# Altium PCB STLINKV2.PcbDoc (part 2 of 2)
Units mm, origin at the board's own origin, x right, y up, seen from the top; angles counter-clockwise.
Board outline 43.47 x 15.24 mm, 2 copper layers (Top Layer, Bottom Layer), stack 1.062 mm thick; 48 components, 36 nets, 171 pads, 85 vias.
Unrouted connection lines stored in the file: 38.
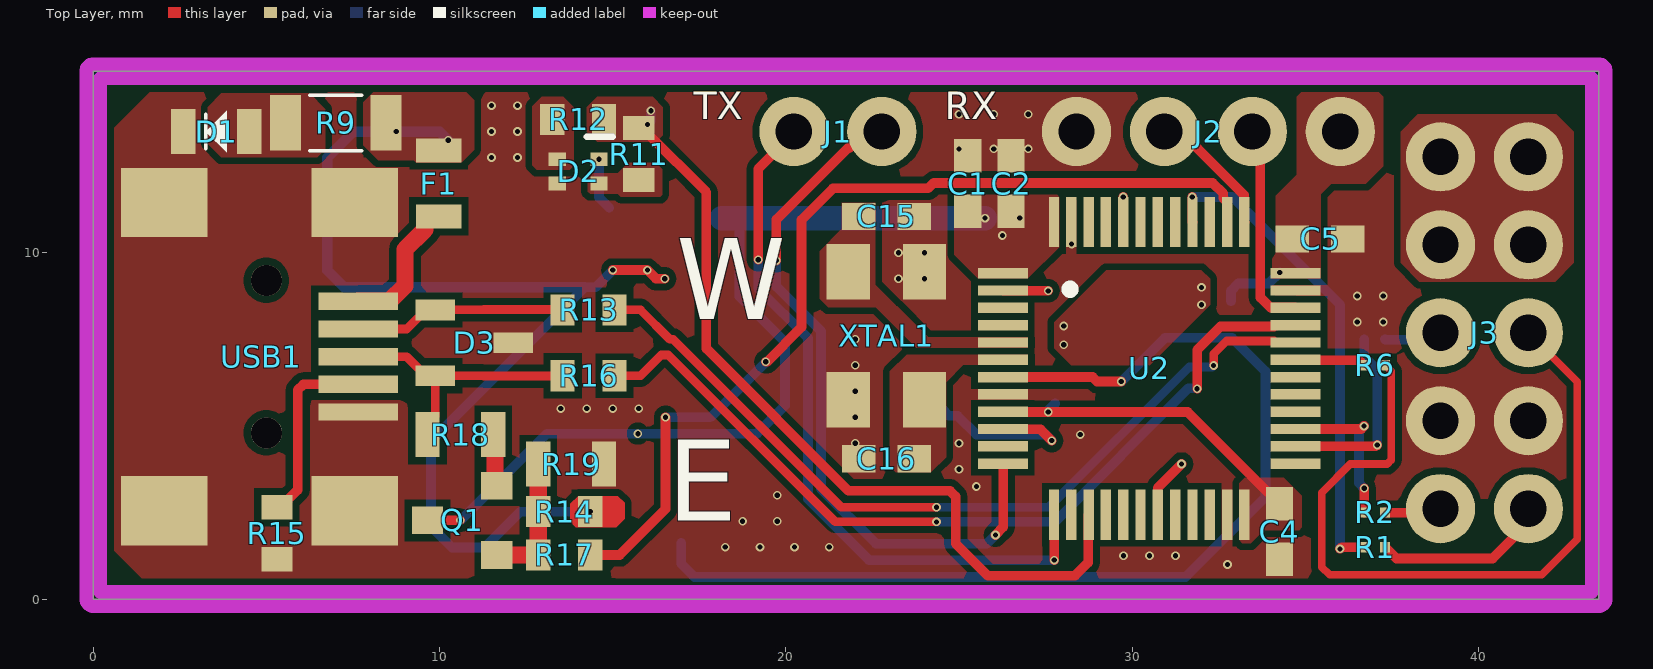
[diagram p0: Top Layer view]

## Part data (continued)
R19: library part "RES 36K OHM 0805", "SMD Chip Resistor, 36 kOhm, ± 1%, 125 mW, 0805 [2012 Metric], Thick Film, General Purpose", Case Code (Metric)=2012, Case Code (Imperial)=0805, Manufacturer=Yageo, Max Operating Temperature=155°C, Max Power Dissipation=125mW, Min Operating Temperature=-55°C, Resistance=36kR, Supplier Part Number 1=1143922, Temperature Coefficient=100ppm/°C, Tolerance=1%, Voltage Rating=150V, Case/Package=0805, Category="Chip SMD Resistors", ComponentLink1Description=http://www.mouser.com/ds/2/447/Yageo_08112016_RC0805-968729.pdf?src-supplier=Mouser, ComponentLink1URL=http://www.mouser.com/ds/2/447/Yageo_08112016_RC0805-968729.pdf?src-supplier=Mouser, ComponentLink2Description=https://datasheet.octopart.com/RC0805FR-0736KL-Yageo-datasheet-164759695.pdf?src-supplier=Future+Electronics, ComponentLink2URL=https://datasheet.octopart.com/RC0805FR-0736KL-Yageo-datasheet-164759695.pdf?src-supplier=Future+Electronics, ComponentLink3Description=http://www.yageo.com/documents/recent/PYu-RC_Group_51_RoHS_L_9.pdf?src-supplier=Digikey, ComponentLink3URL=http://www.yageo.com/documents/recent/PYu-RC_Group_51_RoHS_L_9.pdf?src-supplier=Digikey, ComponentLink4Description=https://datasheet.octopart.com/RC0805FR-0736KL-Yageo-datasheet-118657.pdf?src-supplier=Digikey, ComponentLink4URL=https://datasheet.octopart.com/RC0805FR-0736KL-Yageo-datasheet-118657.pdf?src-supplier=Digikey, DesignedBy="Aslı Kurt", Features="Moisture Resistant", Lead Free=5697LeadFree, Manufacturer Part Number=RC0805FR-0736KL, Number of Terminations=2, Packaging="Tape and Reel", Power Rating=125mW, Pricing 1="5000=0,0031, 25000=0,0029, 100000=0,0028, 250000=0,0027, 625000=0,0026 (USD)", Pricing 2="5000=0,0044, 10000=0,0038, 50000=0,0035, 250000=0,0032, 500000=0,0031 (USD)", Pricing 3="10=0,013, 100=0,008, 500=0,007, 1000=0,006, 2500=0,0055, 5000=0,005, 25000=0,004, 50000=0,0039 (EUR)", Pricing 4="1=0,1, 10=0,012, 50=0,012, 100=0,007, 1000=0,006, 10000=0,005 (USD)", Pricing 5="1=0,1, 10=0,016, 50=0,0132, 500=0,0102, 1000=0,00714 (USD)", RoHS=Yes, RoHS Compliant=Yes, Series=RC, Stock 1=215000, Stock 2=20000, Stock 3=8818, Stock 4=76809, Stock 5=212494, Supplier 1="Future Electronics", Supplier 2="Arrow Electronics", Supplier 3=Farnell, Supplier 4=Mouser, Supplier 5=Digikey, Supplier Part Number 2=RC0805FR-0736KL, Supplier Part Number 3=3496035, Supplier Part Number 4=603-RC0805FR-0736KL, Supplier Part Number 5=311-36.0KCRCT-ND, Termination=SMD/SMT, Voltage Rating (DC)=150V
SW1: "Switch Tactile N.O. SPST Button J-Bend 0.05A 16VDC 100000Cycles 3.92N SMD T/R", Contact Resistance=500mR, Manufacturer="ITT C&K", Manufacturer Part Number=PTS810SJG250SMTRLFS, Category="Tactile Switches", ComponentLink1Description=https://datasheet.ciiva.com/18514/pts810-4mar13-18514165.pdf?src-supplier=Digikey, ComponentLink1URL=https://datasheet.ciiva.com/18514/pts810-4mar13-18514165.pdf?src-supplier=Digikey, ComponentLink2Description=https://datasheet.ciiva.com/18514/pts810-4mar13-18514166.pdf?src-supplier=Digikey, ComponentLink2URL=https://datasheet.ciiva.com/18514/pts810-4mar13-18514166.pdf?src-supplier=Digikey, ComponentLink3Description=https://datasheet.ciiva.com/18514/pts810-4mar13-18514167.pdf?src-supplier=Digikey, ComponentLink3URL=https://datasheet.ciiva.com/18514/pts810-4mar13-18514167.pdf?src-supplier=Digikey, DesignedBy="Aslı Kurt", Lead Free=5697LeadFree, Number of Positions=2NUMBER, Pricing 1="2900=0,3356, 5800=0,3138, 8700=0,3015, 14500=0,2865, 20300=0,2771, 29000=0,2673 (USD)", Pricing 2="1=0,54, 10=0,505, 50=0,505, 100=0,406, 1000=0,333, 10000=0,265 (USD)", Pricing 3="1=0,65, 10=0,526, 25=0,4844, 100=0,4267, 250=0,39208, 500=0,36752, 1000=0,34425 (USD)", Pricing 4="2900=0,3109, 5800=0,29064, 8700=0,27928, 14500=0,26548, 20300=0,25668, 29000=0,2476 (USD)", RoHS=Yes, Stock 1=14500, Stock 2=5429, Stock 3=69769, Stock 4=63800, Supplier 1="Arrow Electronics", Supplier 2=Mouser, Supplier 3=Digikey, Supplier 4=Digikey, Supplier Part Number 1=PTS810SJG250SMTRLFS, Supplier Part Number 2=611-PTS810SJG250SMTR, Supplier Part Number 3=CKN10504DKR-ND, Supplier Part Number 4=CKN10504TR-ND
U1: "800-mA 15-V linear voltage regulator ; 4-SOT-223 0 to 125", Manufacturer="Texas Instruments", Manufacturer Part Number=LM1117MPX-3.3/NOPB, Supplier Part Number 1=926-LM1117MPX3.3NOPB, Category="Voltage Regulators - Linear", ComponentLink1Description=http://www.jameco.com/Jameco/Products/ProdDS/1282978.pdf?src-supplier=Jameco, ComponentLink1URL=http://www.jameco.com/Jameco/Products/ProdDS/1282978.pdf?src-supplier=Jameco, ComponentLink2Description=http://www.mouser.com/ds/2/405/snos412m-286860.pdf?src-supplier=Mouser, ComponentLink2URL=http://www.mouser.com/ds/2/405/snos412m-286860.pdf?src-supplier=Mouser, ComponentLink3Description=http://components.arrow.com/part/dataview/41724903S9714588N1317?src-supplier=Arrow+Electronics, ComponentLink3URL=http://components.arrow.com/part/dataview/41724903S9714588N1317?src-supplier=Arrow+Electronics, ComponentLink4Description=http://www.ti.com/general/docs/lit/getliterature.tsp?genericPartNumber=LM1117&fileType=pdf&src-supplier=Farnell, ComponentLink4URL=http://www.ti.com/general/docs/lit/getliterature.tsp?genericPartNumber=LM1117&fileType=pdf&src-supplier=Farnell, ComponentLink5Description=http://www.ti.com/general/docs/lit/getliterature.tsp?genericPartNumber=LM1117&&fileType=pdf&src-supplier=Farnell, ComponentLink5URL=http://www.ti.com/general/docs/lit/getliterature.tsp?genericPartNumber=LM1117&&fileType=pdf&src-supplier=Farnell, ComponentLink6Description=http://www.ti.com/lit/ds/symlink/lm1117.pdf?src-supplier=Digikey, ComponentLink6URL=http://www.ti.com/lit/ds/symlink/lm1117.pdf?src-supplier=Digikey, ComponentLink7Description=http://www.ti.com/general/docs/lit/getliterature.tsp?genericPartNumber=LM1117&fileType=pdf&src-supplier=Newark, ComponentLink7URL=http://www.ti.com/general/docs/lit/getliterature.tsp?genericPartNumber=LM1117&fileType=pdf&src-supplier=Newark, ComponentLink8Description=http://www.ti.com/general/docs/lit/getliterature.tsp?genericPartNumber=LM1117&&fileType=pdf&src-supplier=Avnet, ComponentLink8URL=http://www.ti.com/general/docs/lit/getliterature.tsp?genericPartNumber=LM1117&&fileType=pdf&src-supplier=Avnet, DesignedBy="Aslı Kurt", Pricing 1="1=1,09, 10=0,715, 50=0,715, 100=0,573, 1000=0,511, 10000=0,445 (USD)", Pricing 2="2000=0,4373, 4000=0,4373, 10000=0,4373, 24000=0,4373 (USD)", Pricing 3="1=1,15, 10=0,802, 25=0,7148, 100=0,6185, 250=0,5726, 500=0,54494, 1000=0,52214 (USD)", Pricing 4="100=0,651, 500=0,58, 1000=0,477 (EUR)", Pricing 5="50=0,662, 100=0,596, 250=0,536, 500=0,51 (GBP)", Radiation Hardening=5898YesNo, RoHS=Yes, Stock 1=43664, Stock 2=94000, Stock 3=15236, Stock 4=4117, Stock 5=3090, Supplier 1=Mouser, Supplier 2="Arrow Electronics", Supplier 3=Digikey, Supplier 4=Farnell, Supplier 5=Rs, Supplier Part Number 2=LM1117MPX-3.3/NOPB, Supplier Part Number 3=LM1117MPX-3.3/NOPBDKR-ND, Supplier Part Number 4=3122024RL, Supplier Part Number 5=2088523P, Thickness=1.6mm
U2: "ARM Cortex-M3 STM32 F1 Microcontroller 32-Bit 72MHz 64kB FLASH LQFP48 STM32F103C8T6", Case/Package=LQFP, Manufacturer=STMicroelectronics, Max Frequency=72MHz, Max Operating Temperature=85°C, Max Supply Voltage=3.6V, Min Operating Temperature=-40°C, Min Supply Voltage=2V, Nominal Supply Current=1.7uA, Package Quantity=1500, Supplier Part Number 1=7957939, Category=Microcontrollers, ComponentLink1Description=https://datasheet.ciiva.com/15122/getdatasheetpartid-69880-15122076.pdf?src-supplier=Verical, ComponentLink1URL=https://datasheet.ciiva.com/15122/getdatasheetpartid-69880-15122076.pdf?src-supplier=Verical, ComponentLink2Description=https://datasheet.ciiva.com/8054/1730126-8054942.pdf?src-supplier=Element14, ComponentLink2URL=https://datasheet.ciiva.com/8054/1730126-8054942.pdf?src-supplier=Element14, ComponentLink3Description=https://datasheet.ciiva.com/14100/pustm-arm-microcont-stm32f103-en-14100508.pdf?src-supplier=Distrelec, ComponentLink3URL=https://datasheet.ciiva.com/14100/pustm-arm-microcont-stm32f103-en-14100508.pdf?src-supplier=Distrelec, ComponentLink4Description=https://datasheet.ciiva.com/16210/cd00161566-16210248.pdf?src-supplier=Future+Electronics, ComponentLink4URL=https://datasheet.ciiva.com/16210/cd00161566-16210248.pdf?src-supplier=Future+Electronics, ComponentLink5Description=https://datasheet.ciiva.com/48687/001075658-da-01-en-mcu-64kb-mem-stm32f103c8t6-lqfp-48-stm-48687589.pdf?src-supplier=Conrad, ComponentLink5URL=https://datasheet.ciiva.com/48687/001075658-da-01-en-mcu-64kb-mem-stm32f103c8t6-lqfp-48-stm-48687589.pdf?src-supplier=Conrad, Core Architecture=ARM, Data Bus Width=32b, DesignedBy="Aslı Kurt", Height=1.4mm, Lead Free="Lead Free", Length=7mm, Manufacturer Part Number=STM32F103C8T6, Memory Size=64KB, Memory Type=FLASH, Number of A/D Converters=2NUMBER, Number of ADC Channels=10, Number of Channels=10NUMBER, Number of Pins=48, Number of Timers/Counters=3, Number of I/Os=37, Packaging=Tray, Pricing 1="250=3,45, 500=3,39, 750=3,36, 1000=3,34, 1250=3,27 (USD)", Pricing 2="250=2,63 (USD)", Pricing 3="1=5,61, 10=5,11, 50=4,3, 100=4,29, 1000=3,47, 10000=3,33 (USD)", Pricing 4="1=5,61, 10=4,64, 25=3,94, 50=3,93, 100=3,92, 250=3,76, 500=3,47 (EUR)", Pricing 5="1=3,7887, 10=3,5549, 25=3,1592, 50=3,139, 100=3,1122, 250=2,9509, 500=2,6084 (USD)", Pricing 6="1=6,11, 10=5,522, 25=5,2652, 80=4,57163, 250=4,36616, 500=3,9809, 1000=3,46724, 2500=3,33883 (USD)", RAM Size=20KB, RoHS=Yes, RoHS Compliant=Yes, Series=STM32F103C8, Stock 1=12000, Stock 2=8204, Stock 3=11174, Stock 4=68762, Stock 5=1132418, Stock 6=9084, Supplier 1="Future Electronics", Supplier 2="Future Electronics", Supplier 3=Mouser, Supplier 4=Farnell, Supplier 5="Arrow Electronics", Supplier 6=Digikey, Supplier Part Number 2=6124222, Supplier Part Number 3=511-STM32F103C8T6, Supplier Part Number 4=1447637, Supplier Part Number 5=STM32F103C8T6, Supplier Part Number 6=497-6063-ND, Weight=0.006349oz, Width=7mm, Interface=I2C,SPI,USB,CAN,USART
USB1: "Conn Mini USB 2.0 Type B RCP 5 POS 0.8mm Solder RA SMD 5 Terminal 1 Port", Color=Black, Flammability Rating="UL94 V-0", Manufacturer=EDAC, Max Operating Temperature=80°C, Min Operating Temperature=-30°C, Supplier Part Number 1=587-690-005-299-043, Category="USB Connectors", ComponentLink1Description=https://datasheet.ciiva.com/30246/690-005-299-043-30246515.pdf?src-supplier=Onlinecomponents.com, ComponentLink1URL=https://datasheet.ciiva.com/30246/690-005-299-043-30246515.pdf?src-supplier=Onlinecomponents.com, ComponentLink2Description=https://datasheet.ciiva.com/29660/690-005-299-043-29660027.pdf?src-supplier=Digikey, ComponentLink2URL=https://datasheet.ciiva.com/29660/690-005-299-043-29660027.pdf?src-supplier=Digikey, ComponentLink3Description=https://datasheet.ciiva.com/29660/690-005-299-043-29660028.pdf?src-supplier=Digikey, ComponentLink3URL=https://datasheet.ciiva.com/29660/690-005-299-043-29660028.pdf?src-supplier=Digikey, ComponentLink4Description=https://datasheet.ciiva.com/29660/690-005-299-043-29660029.pdf?src-supplier=Digikey, ComponentLink4URL=https://datasheet.ciiva.com/29660/690-005-299-043-29660029.pdf?src-supplier=Digikey, Connector Type=USB, Contact Material=Bronze, Contact Plating=Gold, DesignedBy="Aslı Kurt", Gender=Receptacle, Housing Material=Thermoplastic, Lead Free="Lead Free", Manufacturer Part Number=690-005-299-043, Mating Cycles=1500, Mount="Surface Mount,Horizontal", Number of Contacts=5, Number of Ports=1, Orientation="Right Angle", Packaging="Cut Tape", Pitch=0.8mm, Pricing 1="1=0,71, 10=0,476, 50=0,476, 100=0,397, 1000=0,337, 10000=0,27 (USD)", Pricing 2="1=0,75, 10=0,573, 25=0,5148, 50=0,4754, 100=0,4392, 250=0,39636, 500=0,36736 (USD)", Pricing 3="1=0,75, 10=0,573, 25=0,5148, 50=0,4754, 100=0,4392, 250=0,39636, 500=0,36736 (USD)", Pricing 4="1000=0,34102, 2000=0,31713, 3000=0,3042, 5000=0,28894, 7000=0,27949, 10000=0,26996, 25000=0,25 (USD)", RoHS=No, Series=690, Shielding=Unshielded, Stock 1=13065, Stock 2=62687, Stock 3=62687, Stock 4=62000, Supplier 1=Mouser, Supplier 2=Digikey, Supplier 3=Digikey, Supplier 4=Digikey, Supplier Part Number 2=151-1206-1-ND, Supplier Part Number 3=151-1206-6-ND, Supplier Part Number 4=151-1206-2-ND, Termination=Solder, Insulation Color=Black
XTAL1: "Crystal 8MHz ±10ppm (Tol) ±15ppm (Stability) 10pF FUND 100Ohm 4-Pin Mini-SMD T/R", Manufacturer="ECS International", Supplier Part Number 1=ECS-80-10-30B-CWN-, Category=LDO, ComponentLink1Description=https://ecsxtal.com/store/pdf/ecx_53b.pdf?src-supplier=Digikey, ComponentLink1URL=https://ecsxtal.com/store/pdf/ecx_53b.pdf?src-supplier=Digikey, ComponentLink2Description=http://www.ecsxtal.com/store/pdf/ecx_53b.pdf?src-supplier=Digikey, ComponentLink2URL=http://www.ecsxtal.com/store/pdf/ecx_53b.pdf?src-supplier=Digikey, ComponentLink3Description=https://datasheet.octopart.com/ECS-80-10-30B-CWN-TR-ECS-International-datasheet-145012644.pdf?src-supplier=Master+Electronics, ComponentLink3URL=https://datasheet.octopart.com/ECS-80-10-30B-CWN-TR-ECS-International-datasheet-145012644.pdf?src-supplier=Master+Electronics, DesignedBy="Aslı Kurt", Manufacturer Part Number=ECS-80-10-30B-CWN-TR, Pricing 1="1000=0,28356 (USD)", Pricing 2="1000=0,3761, 2000=0,3659 (USD)", Pricing 3="100=0,445, 250=0,434, 500=0,423, 1000=0,405, 5000=0,387, 10000=0,369 (EUR)", Pricing 4="1=0,64, 10=0,52, 50=0,52, 100=0,497, 1000=0,396, 10000=0,366 (USD)", Pricing 5="1=0,68, 10=0,587, 50=0,5288, 100=0,5057, 500=0,45618 (USD)", RoHS=Yes, Stock 1=2000, Stock 2=7000, Stock 3=1351, Stock 4=6496, Stock 5=15344, Supplier 1=Avnet, Supplier 2="Arrow Electronics", Supplier 3=Farnell, Supplier 4=Mouser, Supplier 5=Digikey, Supplier Part Number 2=ECS-80-10-30B-CWN-TR, Supplier Part Number 3=4059249RL, Supplier Part Number 4=520-80-10-30B-CWNT, Supplier Part Number 5=XC2708CT-ND

## Via types
v1: diameter 0.25, hole 0.15, Top Layer to Bottom Layer, tented both sides, 85 vias

## Nets (pads, with @x,y where several pads share a name; then routed paths per layer and width w, separated by ;. In a path a pad name is that pad's centre, name@x,y a point inside that pad or via, vN(x,y) a via of type N, cw(c..) or ccw(c..) an arc to the next point about the centre after c; other vN are vias at no path point)
3V3: C1.2 C2.2 C3.2 C4.2 C5.2 C6.2 C7.2 C8.2 C11.2 C12.1 D2.1 J2.1 J3.7 J3.8 J3.9 J3.10 Q1.1 R3.2 U1.2 U2.1 U2.9 U2.24 U2.36 U2.48 | length 38.4
  Top Layer w0.28: Q1.1 v1(10.6,2.275) ; U2.9@26.275,5.4 v1(27.575,5.4) 31.6,5.4 33.907,3.093 33.996,3.093 34.25,2.839 C4.2
  Bottom Layer w0.28: v1(10.6,2.275) 13.1,4.775 v1(15.725,4.775) 19.162,4.775 19.975,5.588 19.975,7.425 18.66,8.74 18.66,10.84 C12.1@18.5,11 ; v1(14.6,12.7) 14.6,11.6 U1.2@14.9,11.3 ; C12.1 C12.1@18.15,11 ; v1(27.575,5.4) 27.575,5.45 C8.2 ; C6.2 32.85,8.9 33.06,9.11 33.942,9.11 v1(34.261,9.428)
  Bottom Layer w0.7: C12.1@18.15,11 18.5,11 v1(25.75,11)
  other v1: 28.025,7.343 28.025,7.886 32,8.5 32,9 26.25,10.5 26.75,11
5V: C9.1 C10.2 F1.2 R9.1 R14.2 U1.3 | length 31.5
  Top Layer w0.28: v1(15,9.5) v1(16,9.5) 16.25,9.25 v1(16.5,9.25)
  Bottom Layer w0.28: v1(14.35,2.525) 12.329,2.525 11.295,1.491 10.359,1.491 9.75,2.1 9.75,4.561 14.189,9 14.5,9 v1(15,9.5)
  Bottom Layer w0.3: v1(10.249,13.249) 9.999,13.5 v1(8.75,13.5) 7.5,13.5 6.75,12.75 6.75,9.5 7.25,9 U1.3@14.189,9
BOOT0: R4.1 U2.44 | length 0.7
  Top Layer w0.28: U2.44 v1(29.74,11.61)
BOOT1: R5.1 U2.19 | length 1.8
  Top Layer w0.28: U2.19@30.75,2.425 U2.19 30.74,3.215 v1(31.425,3.9)
GND: C1.1 C2.1 C3.1 C4.1 C5.1 C6.1 C7.1 C8.1 C9.2 C10.1 C11.1 C12.2 C13.1 C14.1 C15.1 C16.1 D1.1 D2.4 D3.3 J2.4 J3.3 J3.4 R4.2 R5.2 R8.1 R10.1 R15.2 R19.1 U1.1 U2.8 U2.23 U2.35 U2.47 USB1.5 USB1.SH1 USB1.SH2 USB1.SH3 USB1.SH4 XTAL1.2 XTAL1.4
  other v1: 32.75,1 29.75,1.25 30.5,1.25 31.25,1.25 18.25,1.5 19.25,1.5 20.25,1.5 21.25,1.5 18.75,2.25 19.75,2.25 19.75,3 25.5,3.25 25,3.75 22,4.5 25,4.5 28.5,4.75 22,5.25 13.5,5.5 14.25,5.5 15,5.5 15.75,5.5 22,6 22,6.75 22,7.5 36.5,8 37.25,8 36.5,8.75 37.25,8.75 23.25,9.25 24,9.25 23.25,10 24,10 28.25,10.25 11.5,12.75 12.25,12.75 25,13 26,13 27,13 11.5,13.5 12.25,13.5 25,14 26,14 27,14 11.5,14.25 12.25,14.25
LED_STAT: R11.1 R12.2 U2.15 | length 23.7
  Top Layer w0.28: v1(16,13.7) 16,13.45 17.7,11.75 17.7,7.234 21.809,3.125 24.736,3.125 24.9,2.961 24.9,1.6 25.825,0.675 28.35,0.675 28.73,1.055 28.73,2.425 U2.15
  Bottom Layer w0.28: v1(16,13.7) 16.1,13.8 v1(16.1,14.1)
NetC13_2: C13.2 R10.2 U2.2 | length 1.3
  Top Layer w0.28: U2.2@26.275,8.9 v1(27.575,8.9)
NetC14_2: C14.2 SW1.3 SW1.4
NetD1_2: D1.2 R9.2
NetD2_2: D2.2 R12.1
NetD2_3: D2.3 R11.2
NetJ3_1: J3.1 R1.2 | length 4.9
  Top Layer w0.28: R1.2 37.63,1.17 40.41,1.17 J3.1@41.6,2.36
NetJ3_2: J3.2 R2.2 | length 1.8
  Top Layer w0.28: R2.2 37.31,2.49 38.93,2.49 J3.2@39.06,2.36
NetJ3_5: J3.5 R6.2 | length 21.8
  Top Layer w0.22: R6.2 37.475,6.575 37.475,4.017 37.358,3.9 36.3,3.9 35.475,3.075 35.475,0.925 35.7,0.7 41.82,0.7 42.85,1.73 42.85,6.28 J3.5
NetJ3_6: J3.6 R7.2 | length 1.8
  Bottom Layer w0.28: R7.2 37.31,7.49 39.01,7.49 J3.6@39.06,7.44
NetQ1_2: Q1.2 R14.1 R17.1 R19.2 | length 3.8
  Top Layer w0.5: Q1.2 R17.1 R14.1 R19.2
NetQ1_3: Q1.3 R18.2 | length 1.5
  Top Layer w0.5: R18.2 11.6,4.7 11.6,3.325 Q1.3
NetR15_1: R15.1 USB1.4 | length 5.5
  Top Layer w0.28: R15.1 5.4,2.65 5.9,3.15 5.9,6.036 6.064,6.2 USB1.4
NRST: SW1.1 SW1.2 U2.7 | length 30.8
  Top Layer w0.28: U2.7@26.285,6.41 28.859,6.41 28.985,6.284 v1(29.684,6.284)
  Bottom Layer w0.28: SW1.2 16.975,1.025 17.36,0.64 31.54,0.64 33.85,2.95 33.85,6.575 32.88,7.545 30.945,7.545 v1(29.684,6.284)
OSC_IN: C15.2 U2.5 XTAL1.1
OSC_OUT: C16.2 U2.6 XTAL1.3
RST_OUT: R1.1 U2.40 | length 14.1
  Top Layer w0.28: v1(31.735,11.61) 31.735,10.89 U2.40 ; v1(36,1.45) 36.05,1.5 R1.1
  Bottom Layer w0.28: v1(31.735,11.61) 32.89,11.61 36,8.5 v1(36,1.45)
STLINK_RX: J1.2 U2.12 | length 20.3
  Top Layer w0.28: v1(19.725,9.775) 19.725,10.959 21.794,13.028 21.832,13.028 22.305,13.5 J1.2 ; v1(26.05,1.85) 26.275,2.075 U2.12@26.275,3.9
  Bottom Layer w0.28: v1(19.725,9.775) 19.725,9.025 21.015,7.735 21.015,3.185 22.6,1.6 25.8,1.6 v1(26.05,1.85)
STLINK_TX: J1.1 U2.13 | length 20.8
  Top Layer w0.28: v1(19.2,9.8) 19.2,12.422 20.23,13.452 J1.1 ; v1(27.75,1.125) U2.13@27.75,2.425
  Bottom Layer w0.28: v1(19.2,9.8) 19.2,8.975 20.635,7.54 20.635,2.89 22.4,1.125 v1(27.75,1.125)
SWCLK_MCU: J2.3 U2.37 | length 3.8
  Top Layer w0.28: J2.3 31.395,13.5 31.885,13.011 31.889,13.011 33.23,11.67 33.23,10.895 U2.37
SWCLK_OUT: R7.1 U2.26 | length 5.6
  Top Layer w0.28: U2.26@34.735,4.41 37.035,4.41 v1(37.075,4.45)
  Bottom Layer w0.28: R7.1 36.7,7 37.075,6.625 v1(37.075,4.45)
SWDIO_MCU: J2.2 U2.34 | length 6
  Top Layer w0.28: J2.2@33.52,13.5 33.7,13.32 33.7,8.711 33.991,8.42 34.705,8.42 U2.34@34.725,8.4
SWDIO_OUT: R2.1 U2.27 | length 4.6
  Top Layer w0.28: U2.27 36.61,4.91 v1(36.695,4.995) ; R2.1@36.7,2.502 v1(36.7,3.2)
  Bottom Layer w0.28: v1(36.695,4.995) 36.55,4.85 36.55,3.35 v1(36.7,3.2)
SWIM_OUT: R6.1 U2.31 | length 2
  Top Layer w0.28: U2.31@34.725,6.9 36.55,6.9 R6.1
USB_EN: R17.2 U2.38 | length 27.1
  Top Layer w0.28: R17.2 15.2,1.275 16.525,2.6 v1(16.525,5.25) ; v1(19.419,6.852) 19.452,6.852 20.45,7.85 20.45,10.95 21.36,11.86 24.11,11.86 24.265,12.015 32.324,12.015 32.63,11.709 32.63,11.634 32.63,11.57 32.73,11.47 32.73,10.895 U2.38
  Bottom Layer w0.28: v1(16.525,5.25) 17.816,5.25 v1(19.419,6.852)
USB_N: D3.1 R13.1 USB1.2 | length 6.1
  Top Layer w0.25: USB1.2 9.05,7.8 9.6,8.35 11.267,8.35 11.277,8.36 13.54,8.36 R13.1
USB_P: D3.2 R16.1 R18.1 USB1.3 | length 7.9
  Top Layer w0.25: USB1.3 9.05,7 9.6,6.45 D3.2 ; R18.1 9.65,5.05 9.875,5.275 D3.2 ; R16.1 13.54,6.44 11.277,6.44 11.267,6.45 D3.2
USB_RES_N: R13.2 U2.32 | length 24.2
  Top Layer w0.25: R13.2 15.8,8.35 16.644,7.506 16.739,7.506 21.595,2.65 v1(24.35,2.65) ; v1(32.35,6.745) 32.35,7.075 32.725,7.45 34.1,7.45 34.14,7.41 U2.32
  Bottom Layer w0.25: v1(24.35,2.65) 27.591,2.65 31.644,6.703 32.308,6.703 v1(32.35,6.745)
USB_RES_P: R16.2 U2.33 | length 24.9
  Top Layer w0.25: R16.2 15.8,6.45 16.397,7.047 16.604,7.047 21.421,2.23 v1(24.35,2.23)
  Top Layer w0.28: v1(31.875,6.075) 31.875,7.194 32.551,7.87 34.1,7.87 34.14,7.91 U2.33
  Bottom Layer w0.28: v1(24.35,2.23) 27.765,2.23 31.626,6.092 31.858,6.092 v1(31.875,6.075)
VBUS: F1.1 USB1.1 | length 4.1
  Top Layer w0.5: USB1.1 8.55,8.6 9.001,9.051 9.001,10.096 9.575,10.67 9.575,10.95 9.675,11.05 F1.1
WKUP: R3.1 R8.2 U2.10 | length 5.1
  Top Layer w0.28: U2.10@26.275,4.9 27.35,4.9 v1(27.675,4.575)
  Bottom Layer w0.28: R8.2 24.71,5.29 24.96,5.29 25.5,4.75 27.5,4.75 v1(27.675,4.575)
pads on no net: U2.3 U2.4 U2.11 U2.14 U2.16 U2.17 U2.18 U2.20 U2.21 U2.22 U2.25 U2.28 U2.29 U2.30 U2.39 U2.41 U2.42 U2.43 U2.45 U2.46 USB1.

## Polygon pours and split planes (outlines as drawn)
GND on Bottom Layer "NONET_L01_P-001" (solid, remove dead copper, pour order 43): 0,13 2,15 42,15 43,14 43,1 42,0 2,0 0,2
3V3 on Bottom Layer "NONET_L01_P-001" (solid, pour order 29): 34.75,14.25 35.25,14.75 36.75,14.75 37.25,14.25 37.25,12 37.75,11.5 42.25,11.5 42.75,11 42.75,9.5 42.25,9 38.25,9 37.5,9.75 36.5,9.75 34.75,11.5
BOOT1 on Bottom Layer "NONET_L01_P-001" (solid, pour order 39): 31.125,4.675 30.8,4.35 30.8,3.48 30.993,3.287 31.737,3.287 32.125,3.675 32.125,4.4 31.85,4.675
NRST on Bottom Layer "NONET_L01_P-001" (solid, remove dead copper, pour order 8): 13.4,2.2 13,1.8 13,1.2 13.4,0.8 17.3,0.8 17.6,1.1 17.6,1.9 17.3,2.2
BOOT0 on Bottom Layer "NONET_L01_P-001" (solid, pour order 40): 29.275,12.7 28.95,12.375 28.95,11.505 29.143,11.312 29.887,11.312 30.275,11.7 30.275,12.425 30,12.7
3V3 on Bottom Layer "NONET_L01_P-001" (solid, pour order 32): 25.25,11.5 26.75,11.5 27,11.25 27,10.072 26.25,9.322 26.25,8.261 25,8.261 25,11.25
3V3 on Bottom Layer "NONET_L01_P-001" (solid, pour order 30): 33,9.75 33.5,9.25 33.5,8.25 33,7.75 32.25,7.75 31.75,8.25 31.75,9.25 32.25,9.75
3V3 on Bottom Layer "NONET_L01_P-001" (solid, pour order 25): 27.347,8.27 28.091,8.27 28.258,8 28.258,5.256 27.292,5.256 27,5.549 27,7 26.5,7.5 23.75,7.5 23.5,7.75 23.5,8.25 23.75,8.5 27.117,8.5
3V3 on Bottom Layer "NONET_L01_P-001" (solid, pour order 24): 7.75,13.25 7.25,12.75 7.25,10 7.75,9.5 9.75,9.5 10.75,10.5 19,10.5 19.25,10.75 19.25,11.75 18.827,12.173 10.827,12.173 9.75,13.25
5V on Bottom Layer "NONET_L01_P-001" (solid, remove dead copper, pour order 17): 13.5,10.25 13,9.75 13,7.5 13.5,7 15.676,7 16.176,7.5 17.75,7.5 18.25,8 18.25,9.7 17.7,10.25
NetC13_2 on Bottom Layer "NONET_L01_P-001" (solid, pour order 3): 27.4,9.7 27.1,9.4 27.1,8.8 27.5,8.4 29.3,8.4 29.5,8.6 29.5,9.5 29.3,9.7
NetC14_2 on Bottom Layer "NONET_L01_P-001" (solid, remove dead copper, pour order 9): 13.4,4.35 13,3.95 13,3.35 13.4,2.95 18.85,2.95 19.2,3.3 19.2,4 18.85,4.35
WKUP on Bottom Layer "NONET_L01_P-001" (solid, remove dead copper, pour order 2): 24.25,7 24,7 23.75,6.75 23.75,5.25 24,5 25,5 25.25,5.25 25.25,6.75 25,7
GND on Top Layer "NONET_L01_P-001" (solid, remove dead copper, pour order 44): 0,13 2,15 42,15 43,14 43,1 42,0 2,0 0,2
OSC_IN on Top Layer "NONET_L01_P-001" (solid, pour order 7): 21.617,11.444 21.617,10.692 20.975,10.05 20.975,8.666 21.216,8.425 22.6,8.425 23.765,7.26 26.99,7.26 26.99,7.56 24.105,7.56 22.582,9.082 22.582,10.656 22.582,11.444
NetD2_2 on Top Layer "NONET_L01_P-001" (solid, remove dead copper, pour order 13): 12.95,14.5 12.675,14.225 12.675,12.525 12.8,12.4 13.753,12.4 13.875,12.522 13.875,14.199 13.574,14.5
3V3 on Top Layer "NONET_L01_P-001" (solid, pour order 28): 34.9,2.977 34.377,3.5 33.25,3.5 33.09,3.34 33.09,1.71 33.183,1.617 33.427,1.617 33.5,1.69 33.802,1.992 34.817,1.992 34.9,2.075
3V3 on Top Layer "NONET_L01_P-001" (solid, pour order 31): 27.75,8 27.75,7.25 28.25,6.75 30.5,6.75 32.25,8.5 32.25,9.25 32,9.5 29.25,9.5
3V3 on Top Layer "NONET_L01_P-001" (solid, pour order 27): 24.856,11.682 24.856,9.944 25.54,9.26 26.99,9.26 27.89,10.16 27.89,11.61 27.818,11.682 26.894,11.682
3V3 on Top Layer "NONET_L01_P-001" (solid, pour order 26): 37,14.75 37.25,14.5 37.25,12.5 36.75,12 35.75,12 35.44,11.69 35.44,9.26 33.99,9.254 33.99,9.734 34.142,9.983 34.142,11.642 34.75,12.25 34.75,14.5 35,14.75
GND on Top Layer "NONET_L01_P-001" (solid, pour order 22): 38.38,6.38 37.902,5.902 37.902,4.736 38.547,4.09 41.786,4.09 42.435,4.739 42.435,5.815 41.87,6.38
3V3 on Top Layer "NONET_L01_P-001" (solid, pour order 21): 38.25,11.46 37.75,10.96 37.75,9.71 38.29,9.17 42.21,9.17 42.75,9.71 42.75,10.96 42.25,11.46
3V3 on Top Layer "NONET_L01_P-001" (solid, pour order 19): 38.25,14 37.75,13.5 37.75,11.96 37.75,10.856 39.154,11.116 40.812,11.116 42.75,10.849 42.75,12.25 42.75,13.5 42.25,14
5V on Top Layer "NONET_L01_P-001" (solid, pour order 15): 8.15,14.7 7.8,14.35 7.8,13.1 8.231,12.669 9.256,12.669 9.325,12.6 10.625,12.6 11,12.975 11,14.4 10.7,14.7
LED_STAT on Top Layer "NONET_L01_P-001" (solid, remove dead copper, pour order 4): 14.55,14.5 14.25,14.2 14.25,13.5 14.55,13.2 16.25,13.2 16.45,13.4 16.45,14.2 16.15,14.5
NetD2_3 on Top Layer "NONET_L01_P-001" (solid, remove dead copper, pour order 14): 16.239,12.596 16.425,12.41 16.425,11.675 16.375,11.625 15.236,11.625 15.151,11.7 14.347,11.7 14.284,11.762 14.284,12.254 14.331,12.301 15.151,12.301 15.446,12.596
NetD1_2 on Top Layer "NONET_L01_P-001" (solid, remove dead copper, pour order 12): 3.7,14.6 3.3,14.2 3.3,13.155 3.69,12.765 6.465,12.765 6.7,13 6.7,14.15 6.25,14.6
OSC_OUT on Top Layer "NONET_L01_P-001" (solid, pour order 6): 26.99,7.06 26.99,6.76 25.124,6.76 24.625,6.261 24.625,4.95 24.625,4.099 24.183,3.656 23.169,3.656 23,3.825 23,6.575 23.485,7.06 25.54,7.06

## Keep-outs
Keep-Out Layer:
  lines w0.4: -0.2,0 ccw(c0,0) 0,-0.2 ; -0.2,0 ccw(c0,0) 0,-0.2 ; -0.2,0 -0.2,15.24 ; -0.2,15.24 cw(c0,15.24) 0,15.44 ; -0.2,15.24 cw(c0,15.24) 0,15.44 ; 0,-0.2 43.47,-0.2 ; 0,15.44 43.47,15.44 ; 43.47,-0.2 ccw(c43.47,0) 43.67,0 ; 43.47,-0.2 ccw(c43.47,0) 43.67,0 ; 43.47,15.44 cw(c43.47,15.24) 43.67,15.24 ; 43.47,15.44 cw(c43.47,15.24) 43.67,15.24 ; 43.67,0 43.67,15.24 ; 0.2,0.2 0.2,15.04 43.27,15.04 43.27,0.2 0.2,0.2

## Other copper
Top Layer:
  region net 5V: 14,2.975 15.15,2.975 15.35,2.775 15.35,2.325 15.1,2.075 13.938,2.075 13.775,2.238 13.775,2.75

## Silkscreen, mask and mechanical layers (free items; w line width, h text height)
Top Overlay:
  text "TX" at 17.334,13.85 h0.8
  text "RX" at 24.584,13.85 h0.8
  text "W" at 16.835,7.321 h4
  text "E" at 16.58,1.496 h4
Bottom Overlay:
  text "GND" at 26.816,13.1 h0.8
  text "3V3" at 37.316,11.35 h0.8
  text "CLK" at 31.956,10.08 h0.8
  text "DIO" at 34.7,10.08 h0.8
  text "R" at 10.224,-0.642 h5
Drill Drawing:
  the board outline again, w0.2